# Altium PCB PCB1.PcbDoc
Units mm, origin at the board's own origin, x right, y up, seen from the top; angles counter-clockwise.
Board outline 70 x 30 mm, 2 copper layers (Top Layer, Bottom Layer); 37 components, 29 nets, 156 pads, 29 vias.
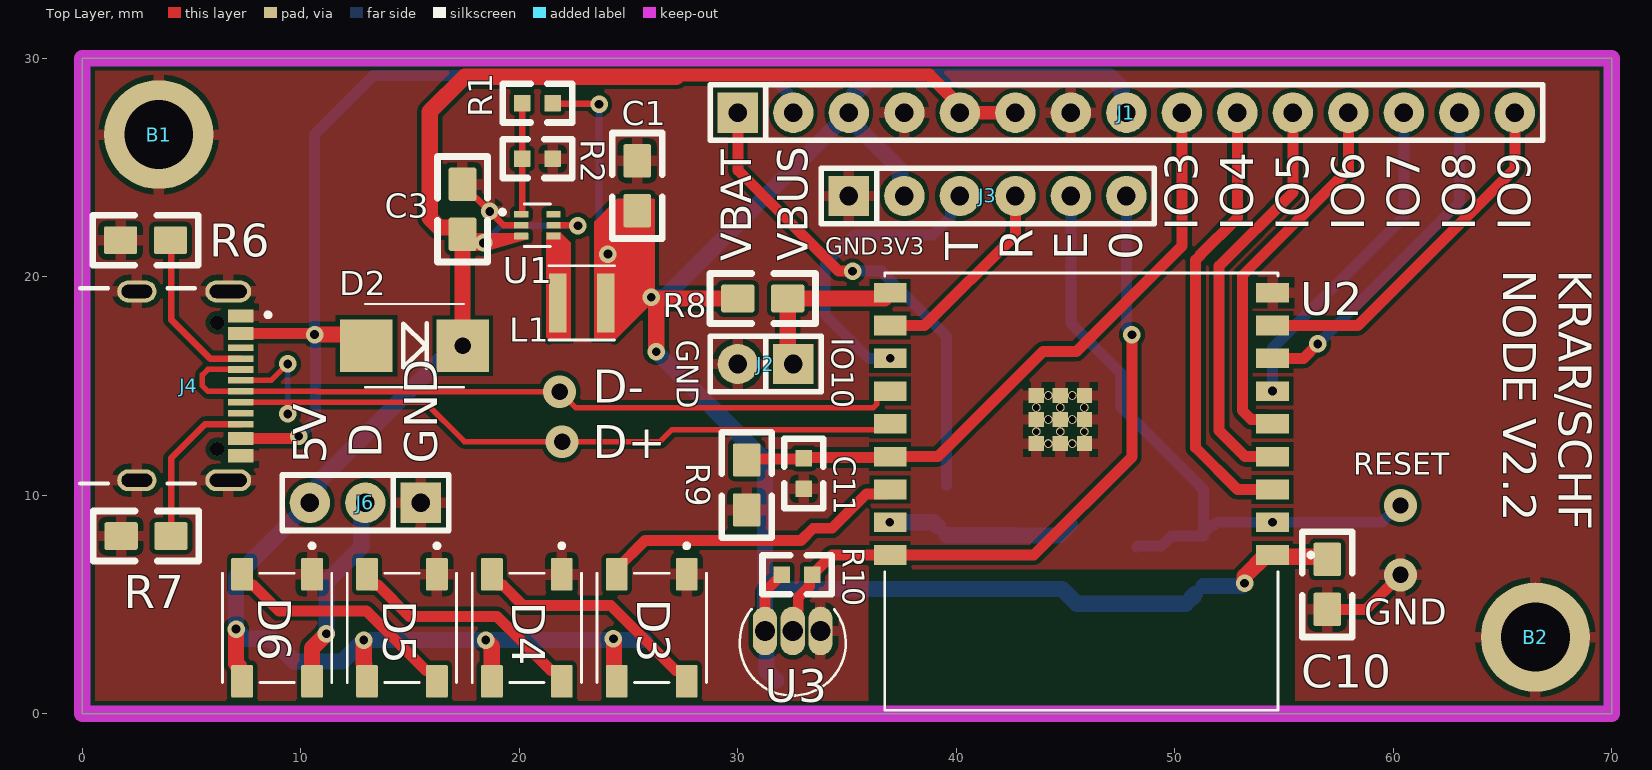
[diagram p0: Top Layer view]
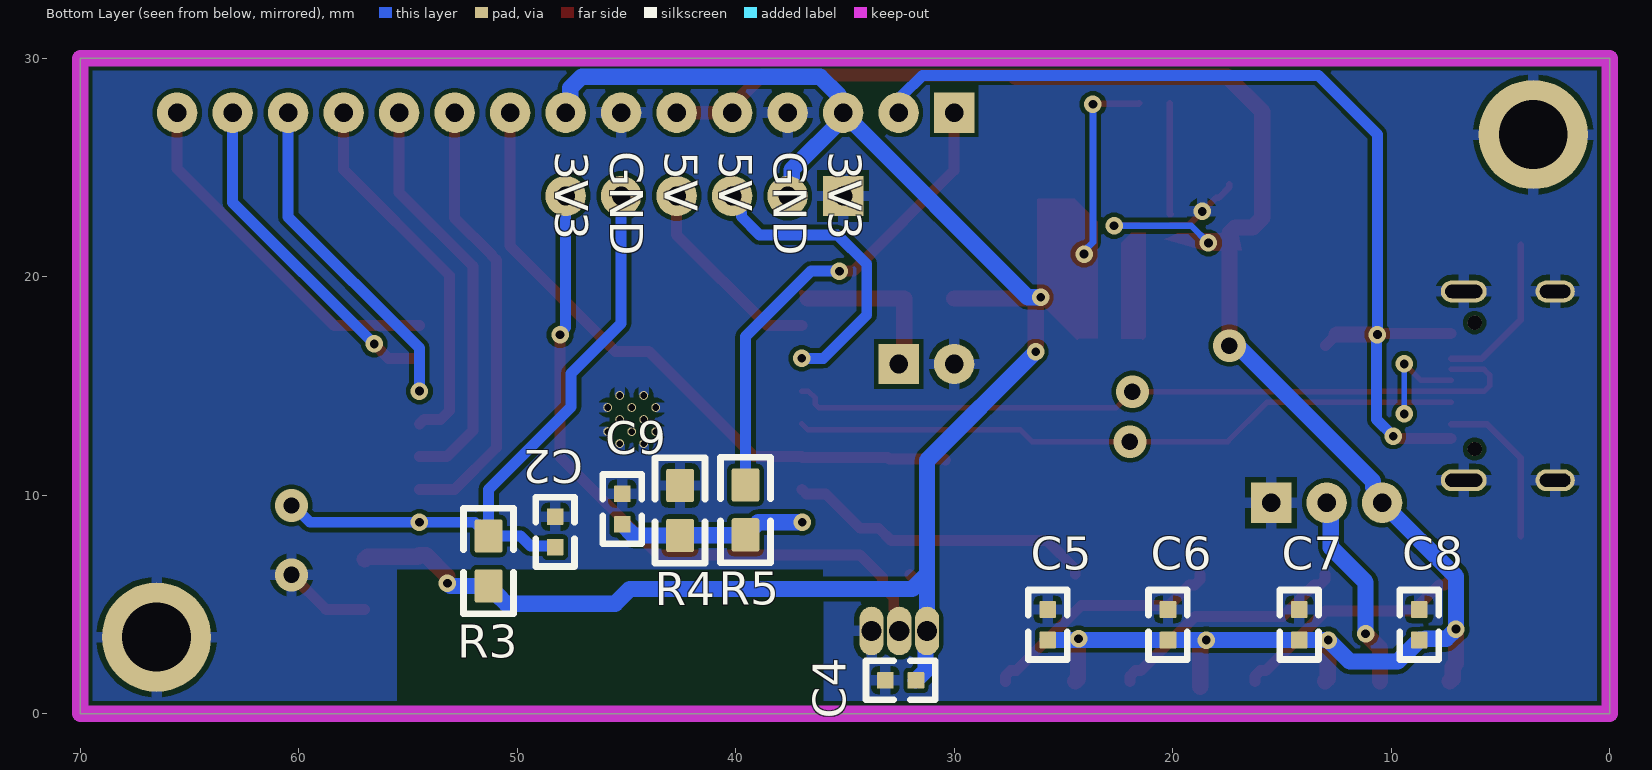
[diagram p1: Bottom Layer view, seen from below]

## Layer stack, top to bottom
Top Solder: solder mask 0.0102, Solder Resist, Dk 3.5
Top Layer: signal copper 0.0356
Dielectric 1: dielectric 0.32, FR-4, Dk 4.8
Bottom Layer: signal copper 0.0356
Bottom Solder: solder mask 0.0102, Solder Resist, Dk 3.5

## Board outline
0,0 0,30 70,30 70,22.5 70,0

## Design rules (kind name [scope] priority, off if disabled: settings)
Clearance [All] p1: gap=0.2 ignorepadtopadclearanceinfootprint=FALSE except(0.1: Arc-Arc Arc-Track Arc-SMDPad Arc-THPad Arc-Via Arc-Text Arc-Hole Track-Track Track-SMDPad Track-THPad Track-Via Track-Text Track-Hole SMDPad-SMDPad SMDPad-THPad SMDPad-Via SMDPad-Text SMDPad-Hole THPad-THPad THPad-Via THPad-Text THPad-Hole Via-Via Via-Text Via-Hole Text-Text Text-Hole)
HoleSize [All] p1: absolutevalues=TRUE maxlimit=6 minlimit=0.2 maxpercent=80.000 minpercent=20.000
MinimumAnnularRing [All] p1: minimumring=0.5
MinimumSolderMaskSliver [All] p1: minsoldermaskwidth=0
PolygonConnect [All] p1: connectstyle=Relief reliefconductorwidth=0.5 reliefentries=4 polygonreliefangle="90 Angle" airgapwidth=0.25
RoutingVias [All] p1: holewidth=0.85 width=1.85 viastyle="Through Hole" minholewidth=0.2 minwidth=0.8 maxholewidth=0.95 maxwidth=1.95
SilkToSilkClearance [All] p1: silktosilkclearance=0
SilkToSolderMaskClearance [IsPad] p1: minsilkscreentomaskgap=0 clearancetoexposedcopper=TRUE
SolderMaskExpansion [All] p1: expansion=0.102 istentingtop=FALSE
Width [All] p1: maxlimit=6 minlimit=0.2 preferedwidth=0.75
26 further rules are at their usual default settings.

## Components (designator, comment, footprint, x,y, rotation, side; value= is the part's Value field where it differs from the comment)
B1 "Schraube" "B_Schraube-M3 PAD" 3.5,26.5 r0 top
B2 "Schraube" "B_Schraube-M3 PAD" 66.5,3.5 r0 top
C1 "10uF" C_SMD_0805 25.4,24.158 r90 top
C2 "100nF" C_SMD_0603 48.26,8.319 r270 bottom
C3 "10uF" C_SMD_0805 17.402,23.08 r90 top
C4 "100nF" C_SMD_0603 32.448,1.524 r0 bottom
C5 "100nF" C_SMD_0603 25.715,4.067 r270 bottom
C6 "100nF" C_SMD_0603 20.215,4.067 r270 bottom
C7 "100nF" C_SMD_0603 14.215,4.067 r270 bottom
C8 "100nF" C_SMD_0603 8.715,4.067 r270 bottom
C9 "100nF" C_SMD_0603 45.187,9.36 r270 bottom
C10 "1uF" C_SMD_0805 56.972,5.918 r270 top
C11 "100nF" C_SMD_0603 33.02,10.986 r90 top
D2 "STPS340" D_DO-221 15.205,16.84 r180 top
D3 "WS2812b" D_SMD_LED-ARGB 25.96,3.429 r90 top
D4 "WS2812b" D_SMD_LED-ARGB 20.245,3.429 r90 top
D5 "WS2812b" D_SMD_LED-ARGB 14.53,3.429 r90 top
D6 "WS2812b" D_SMD_LED-ARGB 8.815,3.429 r90 top
J1 "MODULE_COM" SIP-15 43.97,27.5 r0 top
J2 "BUTTON" SIP-2 31.27,16 r180 top
J3 "SERIAL" SIP-6 42.7,23.69 r0 top
J4 "J_USB-C" GCT_USB4105-GF-A 2.5,15 r270 top
J6 "ARGB_OUTPUT" Sip-3 12.954,9.652 r180 top
L1 "2,2uH" L_SMD_ND_NR3015T2R2M 22.86,18.796 r180 top
R1 "900k" R_SMD_0603 20.828,27.94 r180 top
R2 "200k" R_SMD_0603 20.828,25.4 r0 top
R3 ">10k" R_SMD_0805 51.308,6.985 r270 bottom
R4 "100k" R_SMD_0805 39.548,9.323 r90 bottom
R5 "100k" R_SMD_0805 42.545,9.296 r270 bottom
R6 "5k1" R_SMD_0805 2.896,21.666 r0 top
R7 "5k1" R_SMD_0805 2.921,8.128 r0 top
R8 "100k" R_SMD_0805 31.143,19 r180 top
R9 "100k" R_SMD_0805 30.404,10.465 r90 top
R10 "4k7" R_SMD_0603 32.713,6.361 r180 top
U1 "U_TLV62569P" SOT50P160X60-6N 20.828,22.352 r0 top
U2 "ESP32-C3-WROOM-02-N4" MODULE_ESP32-C3-WROOM-02-H4 45.72,10.16 r180 top
U3 "U_DS18B20" TO-92_DS18B20 32.512,3.023 r180 top

## Footprints (in the part's own frame and the unit in brackets; to place one, negate y for a bottom-side part, rotate by r counter-clockwise, add the part's x,y. Pads: shape width x height; smd on the part's side, far side on the other; paste and mask are expansions set on the pad)
"B_Schraube-M3 PAD" [mm] "LB-2024-04-18"
  round 5 hole 3.15 unplated: 1(0,0)
C_SMD_0603 [mil] "LB-2024-04-17"
  rrect10% 30x30 smd paste-0.79 mask+1.97: 1(-27.5,0) 2(27.5,0)
  silkscreen extent -63,-35 63,35
C_SMD_0805 [mil] "LB-2024-04-17"
  rrect15% 60x50 smd paste-0.79 mask+1.97: 1(-45,0) 2(45,0)
  silkscreen extent -95,-45 95,45
D_DO-221 [mm]
  rect 2.4x2.4 smd: 1(2.2,0) 2(-2.2,0)
  silkscreen extent -2.26,-1.91 2.26,1.91
D_SMD_LED-ARGB [mm] "LB-2024-04-17"
  rrect15% 1.5x1 smd paste-0.02 mask+0.05: 1(-1.95,1.5) 2(-1.95,-1.7) 3(2.95,-1.7) 4(2.95,1.5)
  silkscreen extent -2,-2.6 4.35,2.4
GCT_USB4105-GF-A [mm] "USB-C: Power + USB 2.0"
  rect 0.6x1.15 smd mask+0.05: A1_B12(-3.2,4.755) A4_B9(-2.4,4.755) B1_A12(3.2,4.755) B4_A9(2.4,4.755)
  rect 0.3x1.15 smd mask+0.05: A5(-1.25,4.755) A6(-0.25,4.755) A7(0.25,4.755) A8(1.25,4.755) B5(1.75,4.755) B6(0.75,4.755) B7(-0.75,4.755) B8(-1.75,4.755)
  oval 1x2.1 hole 0.6 slot 1.7 at 90 deg: SH1(-4.32,4.18) SH2(4.32,4.18)
  oval 1x1.8 hole 0.6 slot 1.4 at 90 deg: SH3(-4.32,0) SH4(4.32,0)
  round 0.65 hole 0.65 unplated: ""(-2.89,3.68) ""(2.89,3.68)
  silkscreen extent -4.47,-2.6 4.47,6.1
L_SMD_ND_NR3015T2R2M [mm]
  rect 0.8x2.7 smd: 1(-1.1,0) 2(1.1,0)
  silkscreen extent -1.5,-1.7 1.5,1.7, body extent -1.5,-1.5 1.5,1.5, height 1.5
MODULE_ESP32-C3-WROOM-02-H4 [mm]
  rect 1.5x0.9 smd: 1(-8.75,2.9) 2(-8.75,1.4) 3(-8.75,-0.1) 4(-8.75,-1.6) 5(-8.75,-3.1) 6(-8.75,-4.6) 7(-8.75,-6.1) 8(-8.75,-7.6) 9(-8.75,-9.1) 10(8.75,-9.1) 11(8.75,-7.6) 12(8.75,-6.1) 13(8.75,-4.6) 14(8.75,-3.1) 15(8.75,-1.6) 16(8.75,-0.1) 17(8.75,1.4) 18(8.75,2.9)
  rect 0.7x0.7 smd: 9(-0.14,-2.2) 9(-0.14,-3.3) 9(-0.14,-4.4) 9(0.96,-2.2) 9(0.96,-3.3) 9(0.96,-4.4) 9(2.06,-4.4) 9(2.06,-3.3) 9(2.06,-2.2)
  round 0.4 hole 0.3 mask+0: 9(-0.14,-2.75) 9(-0.14,-3.85) 9(0.41,-2.2) 9(0.41,-3.3) 9(0.41,-4.4) 9(0.96,-2.75) 9(0.96,-3.85) 9(1.51,-2.2) 9(1.51,-3.3) 9(1.51,-4.4) 9(2.06,-3.85) 9(2.06,-2.75)
  silkscreen extent -10.6,-10 9,10, body extent -9,-10 9,10, height 3.35
R_SMD_0603 [mil] "LB-2024-04-17"
  rrect10% 30x30 smd paste-0.79 mask+1.97: 1(-27.5,0) 2(27.5,0)
  silkscreen extent -63,-35 63,35
R_SMD_0805 [mil] "LB-2024-04-17"
  rrect15% 60x50 smd paste-0.79 mask+1.97: 1(-45,0) 2(45,0)
  silkscreen extent -95,-45 95,45
SIP-2 [mm] "LB-2024-04-17"
  rect 1.85x1.85 hole 0.85: 1(-1.27,0)
  round 1.85 hole 0.85: 2(1.27,0)
  silkscreen extent -2.54,-1.27 2.54,1.27
Sip-3 [mm] "LB-2024-04-17"
  rect 1.85x1.85 hole 0.85: 1(-2.54,0)
  round 1.85 hole 0.85: 2(0,0) 3(2.54,0)
  silkscreen extent -3.81,-1.27 3.81,1.27
SIP-6 [mm] "LB-2024-04-17"
  rect 1.85x1.85 hole 0.85: 1(-7.62,0)
  round 1.85 hole 0.85: 2(-5.08,0) 3(-2.54,0) 4(0,0) 5(2.54,0) 6(5.08,0)
  silkscreen extent -8.89,-1.27 6.35,1.27
SIP-15 [mm] "LB-2024-04-17"
  rect 1.85x1.85 hole 0.85: 1(-13.97,0)
  round 1.85 hole 0.85: 2(-11.43,0) 3(-8.89,0) 4(-6.35,0) 5(-3.81,0) 6(-1.27,0) 7(1.27,0) 8(3.81,0) 9(6.35,0) 10(8.89,0) 11(11.43,0) 12(13.97,0) 13(16.51,0) 14(19.05,0) 15(21.59,0)
  silkscreen extent -15.24,-1.27 22.86,1.27
SOT50P160X60-6N [mm]
  rrect15% 0.66x0.31 smd paste-0.02 mask+0.05: 1(-0.735,0.5) 2(-0.735,0) 3(-0.735,-0.5) 4(0.735,-0.5) 5(0.735,0) 6(0.735,0.5)
  silkscreen extent -1.7,-0.97 0.6,0.97
TO-92_DS18B20 [mm]
  oval 1.11x2.22 hole 0.93: 1(-1.27,-0.76) 2(0,-0.76) 3(1.27,-0.76)
  silkscreen extent -2.43,-1.76 2.43,2.19

## Part data
B1 B2: library part B_Schraube, "Schraubenloch für M3 Schrauben"
C1 C2 C3 C4 C5 C6 C7 C8 C9 C11: library part C_SMD_KO, "Kondensator SMD Universal, Keramik, Folie, usw."
C10: library part C_SMD_Tantal, "Tantalkondensator"
D2: library part D_SMD_Schottky, "Diode SMD Schottky", Spannung Rev.=0,4V
D3 D4 D5 D6: library part D_SMD_LED-ARGB, "Diode SMD ARGB"
J1: library part J_THT_CON15, "Stecker"
J2: library part J_THT_CON2, "Stecker"
J3: library part J_THT_CON6, "Stecker"
J4: "USB4105-GF-", Package=None, Availability=Unavailable, MF="{'manufacturer': u'GCT'}", MP=USB4105-GF-A, Price=None
J6: library part J_THT_CON3, "Stecker"
L1: library part L_SMD_Spule, "Spule SMD"
R1 R2 R3 R4 R5 R6 R7 R8 R9 R10: library part R_SMD_Widerstand, "Widerstand SMD"
U2: "WiFi Modules (802.11) (Engineering Samples) SMD module, ESP32-C3, 4MB SPI flash, PCB antenna, -40 C +85 C", Package=Package, Availability="In Stock", Check_prices=https://www.snapeda.com/parts/ESP32-C3-WROOM-02-N4/Espressif+Systems/view-part/?ref=eda, MF="Espressif Systems", MP=ESP32-C3-WROOM-02-N4, Price=None, Purchase-URL=https://pricing.snapeda.com/search/part/ESP32-C3-WROOM-02-N4/?ref=eda, SnapEDA_Link=https://www.snapeda.com/parts/ESP32-C3-WROOM-02-N4/Espressif+Systems/view-part/?ref=snap
U3: "Temperature Sensor Digital, Local -55Â°C ~ 125Â°C 12 b 8-uMAX-EP", Package="TO-226-3 Maxim", Availability="In Stock", Check_prices=https://www.snapeda.com/parts/DS18B20/Maxim+Integrated/view-part/?ref=eda, MF=Maxim, MP=DS18B20, Price=None, Purchase-URL=https://pricing.snapeda.com/search/part/DS18B20/?ref=eda, SnapEDA_Link=https://www.snapeda.com/parts/DS18B20/Maxim+Integrated/view-part/?ref=snap

## Via types
v1: diameter 0.8, hole 0.4, Top Layer to Bottom Layer, 24 vias
v2: diameter 1.5, hole 0.75, Top Layer to Bottom Layer, 5 vias

## Nets (pads, with @x,y where several pads share a name; then routed paths per layer and width w, separated by ;. In a path a pad name is that pad's centre, name@x,y a point inside that pad or via, vN(x,y) a via of type N, cw(c..) or ccw(c..) an arc to the next point about the centre after c; other vN are vias at no path point)
3,3V: C1.1 C4.1 C10.1 J1.3 J1.8 J3.2 L1.1 R1.1 R3.2 R8.2 R10.2 U2.1 U3.3 | length 99
  Top Layer w0.3: R1.1 21.552,27.915 23.622,27.915 v1(23.647,27.889)
  Top Layer w0.5: U3.3 31.242,5.588 R10.2
  Top Layer w0.75: L1.1@23.96,17.846 L1.1 ; v1(24.054,21.031) v1(26.035,19.05) ; v1@26.254,16.57 v1(26.264,16.561) 26.264,18.821 v1(26.035,19.05) ; R8.2 26.099,19 26.049,19.05 v1(26.035,19.05) ; J1.3 J1.3@35.29,27.71 ; J1.8@47.57,27.71 J1.8 ; v1(53.188,5.969) 53.197,5.979 53.197,6.287 54.17,7.26 U2.1 54.545,7.185 56.848,7.185 C10.1
  Bottom Layer w0.3: v1(23.647,27.889) 23.647,21.573 24.054,21.167 v1(24.054,21.031)
  Bottom Layer w0.75: v1(26.035,19.05) 26.045,19.06 26.64,19.06 J1.3 35.08,27.246 37.428,24.898 37.428,23.882 J3.2 ; v1(26.264,16.561) 31.242,11.582 31.242,6.375 ; C4.1 31.311,1.963 31.311,3.714 U3.3 31.242,6.375 ; J1.3@35.29,27.71 35.29,28.305 36.135,29.15 47.05,29.15 47.57,28.63 J1.8@47.57,27.71 ; R3.2@50.921,5.455 50.495,5.029 45.517,5.029 44.844,5.702 31.915,5.702 31.242,6.375 ; R3.2 53.047,5.842 53.174,5.969 v1(53.188,5.969)
5V: C3.1 C5.2 C6.2 C7.2 C8.2 D2.2 D3.1 D4.1 D5.1 D6.1 J1.5 J1.6 J6.3 U1.3 U1.5 | length 91.9
  Top Layer w0.3: U1.5 21.568,22.347 22.662,22.347 v1(22.682,22.327)
  Top Layer w0.6: 27.178,29.15 27.253,29.225 38.765,29.225 40.16,27.83 J1.5 J1.6
  Top Layer w0.75: v1(7.037,3.868) 7.037,2.293 7.19,2.14 7.19,1.604 D6.1 ; v1(12.879,3.369) 12.879,2.293 12.905,2.267 12.905,1.604 D5.1 ; v2(17.405,16.84) 17.402,16.843 C3.1 17.402,21.987 17.142,22.247 16.342,22.247 15.903,22.686 15.903,27.551 17.502,29.15 27.178,29.15 ; v1(18.467,3.369) 18.467,3.355 18.745,3.077 D4.1 D4.1@18.745,1.229 ; v1(24.309,3.429) 24.309,3.415 24.335,3.389 24.335,1.604 D3.1
  Bottom Layer w0.3: v1(18.364,21.539) 19.152,22.327 v1(22.682,22.327)
  Bottom Layer w0.75: v2(17.405,16.84) 17.395,16.831 17.034,16.831 10.834,10.631 10.834,10.37 10.414,9.95 J6.3 7.037,6.275 v1(7.037,3.868) 7.476,3.429 8.446,3.429 8.5,3.375 8.709,3.375 9.696,2.388 11.898,2.388 v1(12.879,3.369) C7.2 v1(18.467,3.369) 24.235,3.369 24.295,3.429 24.323,3.429 24.383,3.369 C5.2
GND: B1.1 B2.1 C1.2 C2.1 C3.2 C4.2 C5.1 C6.1 C7.1 C8.1 C9.1 C10.2 C11.1 D3.3 D4.3 D5.3 D6.3 J1.4 J1.7 J2.2 J3.1 J4.A1_B12 J4.B1_A12 J4.SH1 J4.SH2 J4.SH3 J4.SH4 J6.1 R2.2 R5.1 R6.1 R7.1 R9.1 U1.2 U2.9 U3.1 | length 7.5
  Top Layer w0.3: C3.2 17.402,24.096 17.887,23.611 18.014,23.611 19.273,22.352 U1.2
  Top Layer w0.5: C10.2 58.75,4.775 v2(60.325,6.35)
  other v1: 18.643,22.982
NetC2_2: C2.2 J3.5 R3.1 U2.2 | length 30.9
  Bottom Layer w0.5: J3.5 45.24,17.848 47.526,15.562 47.526,14.038 51.308,10.256 R3.1@51.308,8.255 ; C2.2 48.313,7.673 49.391,7.673 49.846,8.128 R3.1 R3.1@51.308,8.255 ; v2(60.325,9.525) 60.244,9.525 59.479,8.76 v1(54.47,8.76) 51.94,8.76 51.82,8.64 51.693,8.64 R3.1@51.308,8.255
NetC9_2: C9.2 R4.1 R5.2 U2.17 | length 8.2
  Top Layer w0.25: v1(36.957,8.763) 36.96,8.76 U2.17
  Bottom Layer w0.75: v1(36.957,8.763) 38.965,8.763 R4.1@39.161,8.567 ; R4.1 39.561,8.167 42.532,8.167 R5.2 44.679,8.153 C9.2
NetC11_2: C11.2 J1.9 R9.2 U2.15 | length 30.1
  Top Layer w0.5: R9.2 30.442,11.646 32.982,11.646 C11.2 33.058,11.722 36.932,11.722 U2.15 39.152,11.76 43.97,16.578 45.494,16.578 50.32,21.404 J1.9
NetD3_2: D3.2 D4.4 | length 11.2
  Top Layer w0.5: D4.4 18.745,6.129 18.995,5.879 19.245,5.879 20.171,4.953 24.186,4.953 27.16,1.979 27.41,1.979 27.66,1.729 D3.2
NetD3_4: D3.4 U2.16 | length 14.3
  Top Layer w0.5: D3.4 24.46,6.629 25.756,7.925 32.893,7.925 33.452,8.484 34.315,8.484 35.892,10.06 36.77,10.06 U2.16
NetD4_2: D4.2 D5.4 | length 11.2
  Top Layer w0.5: D5.4 13.03,6.129 13.28,5.879 13.53,5.879 14.964,4.445 18.979,4.445 21.445,1.979 21.695,1.979 21.945,1.729 D4.2
NetD5_2: D5.2 D6.4 | length 11.2
  Top Layer w0.5: D6.4 7.315,6.129 7.565,5.879 7.815,5.879 8.995,4.699 13.01,4.699 15.73,1.979 15.98,1.979 16.23,1.729 D5.2
NetD6_2: D6.2 J6.2 | length 9.2
  Top Layer w0.75: D6.2 10.515,2.997 v1(11.176,3.658)
  Bottom Layer w0.75: v1(11.176,3.658) 11.176,6.02 12.758,7.602 12.758,9.456 J6.2
NetJ1_10: J1.10 U2.3 | length 20.4
  Top Layer w0.5: J1.10 52.86,22.685 51.156,20.98 51.156,20.955 50.952,20.752 50.952,12.167 52.859,10.26 U2.3
NetJ1_11: J1.11 U2.4 | length 18.9
  Top Layer w0.5: U2.4 53.213,11.76 52.023,12.95 52.023,20.476 55.4,23.853 J1.11
NetJ1_12: J1.12 U2.5 | length 17.3
  Top Layer w0.5: U2.5 54.27,13.46 53.494,13.46 53.086,13.868 53.086,20.041 57.94,24.895 J1.12
NetJ1_13: J1.13 U2.6 | length 15.3
  Top Layer w0.5: U2.6@54.407,14.732 54.442,14.732 v1(54.47,14.76)
  Bottom Layer w0.5: v1(54.47,14.76) 54.47,16.726 60.48,22.736 J1.13
NetJ1_14: J1.14 U2.7 | length 15.6
  Top Layer w0.5: U2.7 55.884,16.26 v1(56.54,16.916)
  Bottom Layer w0.5: v1(56.54,16.916) 63.02,23.396 J1.14
NetJ1_15: J1.15 U2.8 | length 16.6
  Top Layer w0.5: U2.8 58.375,17.76 65.56,24.945 J1.15
NetJ2_1: J2.1 R8.1 U2.10 | length 7.9
  Top Layer w0.25: J2.1@32.286,16.254 J2.1 ; U2.10@36.71,19 U2.10
  Top Layer w0.75: J2.1@32.286,16.254 R8.1 U2.10@36.71,19
NetJ3_3: J3.3 U2.12 | length 13.9
  Bottom Layer w0.5: v1(36.97,16.26) 35.99,16.26 34,18.25 34,20.578 35.334,21.912 38.912,21.912 39.741,22.741 39.741,22.905 40.16,23.325 J3.3
NetJ3_4: J3.4 U2.11 | length 9.2
  Top Layer w0.5: U2.11 38.548,17.76 42.7,21.912 J3.4
NetJ3_6: J3.6 R10.1 U2.18 U3.2 | length 31.8
  Top Layer w0.5: U3.2 32.512,4.503 32.766,4.757 32.766,5.309 33.28,5.823 33.28,6.229 34.311,7.26 U2.18 43.542,7.26 48.034,11.752 v1(48.034,17.34)
  Bottom Layer w0.5: J3.6 47.78,17.675 48.034,17.421 v1(48.034,17.34)
NetJ4_A5: J4.A5 R6.2 | length 7.4
  Top Layer w0.3: R6.2@4.064,21.463 4.064,18.034 5.848,16.25 J4.A5
NetJ4_A6: J4.A6 J4.B6 U2.14 | length 36.1
  Top Layer w0.25: J4.B6 9.398,14.25 ; J4.A6 8.646,15.25 v1(9.398,16.002) ; v1(9.398,13.716) 9.398,14.25 ; U2.14 36.71,13 26.988,13 26.434,12.446 v2(21.958,12.446) 17.482,12.446 15.678,14.25 9.398,14.25
  Bottom Layer w0.25: v1(9.398,13.716) v1(9.398,16.002)
NetJ4_A7: J4.A7 J4.B7 U2.13 | length 34.7
  Top Layer w0.25: J4.B7 5.75,15.75 5.5,15.5 5.5,15 5.75,14.75 J4.A7 10.75,14.75 10.768,14.732 v2(21.844,14.732) 22.576,14 36.207,14 36.353,14.146 36.353,14.435 36.678,14.76 U2.13
NetJ4_B5: J4.B5 R7.2 | length 7.4
  Top Layer w0.3: R7.2 4.064,11.684 5.63,13.25 J4.B5
NetL1_2: L1.2 U1.4
NetR1_2: R1.2 R2.1 U1.1 | length 5.1
  Top Layer w0.3: U1.1 20.124,22.852 20.13,22.857 R2.1 R1.2
V_BAT: J1.1 R4.2 | length 22.1
  Top Layer w0.5: J1.1 30,24.864 34.614,20.25 v1(35.25,20.25)
  Bottom Layer w0.5: v1(35.25,20.25) 36.55,20.25 39.548,17.252 R4.2
VBUS: D2.1 J1.2 J4.A4_B9 J4.B4_A9 | length 46.9
  Top Layer w0.5: J4.B4_A9 9.725,12.6 9.825,12.7 v1(9.906,12.7) ; J4.A4_B9 10.459,17.4 10.587,17.272 v1@10.668,17.272 ; D2.1@12.497,17.348 D2.1
  Top Layer w0.75: v1(10.633,17.348) D2.1@12.497,17.348
  Bottom Layer w0.5: v1(9.906,12.7) 10.668,13.462 v1@10.668,17.272 ; v1(10.633,17.348) 10.633,26.508 13.335,29.21 31.457,29.21 32.385,28.282 32.385,27.655 J1.2
pads on no net: J4. J4.A8 J4.B8 U1.6

## Polygon pours and split planes (outlines as drawn)
GND on Top Layer "GND_L01_P000" (solid, remove dead copper, pour order 0): -3.302,34.925 -2.794,35.433 77.47,35.433 77.47,1.397 75.184,-0.889 -4.064,-0.889
GND on Bottom Layer "GND_L02_P001" (solid, remove dead copper, pour order 1): -12.319,-7.62 77.089,-7.62 80.645,-11.176 80.645,40.64 -3.175,40.64 -12.827,30.988

## Keep-outs
Keep-Out Layer:
  lines w0.75: 0,0 0,30 19.25,30 56.75,30 70,30 70,22.5 70,7.5 70,0 56.25,0 46.875,0 28.125,0 18.75,0 0,0

## Other copper
Top Layer:
  pour cut-out: 36,6 35.97,5.97 35.97,0 55.47,0 55.5,0.03 55.5,6.6 36,6.6
  region net 3,3V: 26.162,23.571 26.187,23.546 26.187,18.923 24.36,17.096 24.286,17.17 23.419,17.17 23.419,21.158 23.419,21.26 23.419,21.361 23.419,22.504 24.486,23.571
  region net NetL1_2: 21.234,21.996 21.234,17.222 21.36,17.096 21.409,17.145 22.352,17.145 22.352,21.539 21.895,21.996
  region net 5V: 19.789,21.988 20.396,21.717 18.466,21.158 16.843,21.201 17,21.988
Bottom Layer:
  pour cut-out: 36,6 35.97,5.97 35.97,0 55.47,0 55.5,0.03 55.5,6.6 36,6.6

## Silkscreen, mask and mechanical layers (free items; w line width, h text height)
Top Overlay:
  text "IO3" at 51.054,22.098 h1.52 r90
  text "IO4" at 53.594,22.098 h1.52 r90
  text "IO5" at 56.134,22.098 h1.52 r90
  text "IO6" at 58.674,22.098 h1.52 r90
  text "IO7" at 61.214,22.098 h1.52 r90
  text "IO8" at 63.754,22.098 h1.52 r90
  text "IO9" at 66.294,22.098 h1.52 r90
  text "GND" at 34.004,21.004 h0.76
  text "3V3" at 36.504,21.004 h0.76
  text "T" at 40.996,20.754 h1.52 r90
  text "R" at 43.496,20.754 h1.52 r90
  text "E" at 45.996,20.754 h1.52 r90
  text "0" at 48.496,20.754 h1.52 r90
  text "VBAT" at 30.607,20.701 h1.4 r90
  text "VBUS" at 33.198,20.701 h1.4 r90
  text "NODE V2.2" at 65.024,20.32 h1.52 r270
  text "KRAR/SCHF" at 67.564,20.32 h1.52 r270
  text "IO10" at 34.29,17.196 h1 r270
  text "GND" at 27.203,17.12 h1 r270
  text "D-" at 23.368,14.224 h1.52
  text "D" at 13.716,11.684 h1.52 r90
  text "D+" at 23.368,11.684 h1.52
  text "5V" at 11.176,11.43 h1.52 r90
  text "GND" at 16.256,11.43 h1.52 r90
  text "RESET" at 58.166,10.922 h1
  text "GND" at 58.674,4.064 h1.2
Bottom Overlay:
  text "3V3" at 35.746,25.746 h1.52 r90
  text "GND" at 38.246,25.746 h1.52 r90
  text "5V" at 40.746,25.746 h1.52 r90
  text "5V" at 43.246,25.746 h1.52 r90
  text "GND" at 45.746,25.746 h1.52 r90
  text "3V3" at 48.246,25.746 h1.52 r90
Bemaßung:
  lines w0.254: -0.099,32.131 -0.099,32.639 ; 1.425,31.877 -0.099,32.385 ; 1.425,32.893 -0.099,32.385 ; 29.797,32.385 -0.099,32.385 ; 40.005,32.385 69.901,32.385 ; 68.377,31.877 69.901,32.385 ; 68.377,32.893 69.901,32.385 ; 69.901,32.131 69.901,32.639 ; 71.882,1.74 72.39,0.216 ; 71.882,28.692 72.39,30.216 ; 72.136,0.216 72.644,0.216 ; 72.136,30.216 72.644,30.216 ; 72.39,10.112 72.39,0.216 ; 72.39,20.32 72.39,30.216 ; 72.898,1.74 72.39,0.216 ; 72.898,28.692 72.39,30.216
  text "70 (mm)" at 30.051,31.471 h1.52
  text "30 (mm)" at 73.304,10.366 h1.52 r90
Kontur:
  lines w0.254: 70,29.972 0,29.972 0,0 70,0 70,7.5 70,22.5 70,30

## Text inside footprints (layer, text, board x,y; h text height)
J4: Mechanical 13 "PCB EDGE" at 0.1,16.7 h0.41 r270